# Altium PCB ESIMA_E_Meter_CPU.PcbDoc (part 2 of 2)
Units mm, origin at the board's own origin, x right, y up, seen from the top; angles counter-clockwise.
Board outline 113.5 x 71.72 mm, 4 copper layers (Top Layer, Mid1, Mid2, Bottom Layer), stack 0.778 mm thick; 163 components, 166 nets, 524 pads, 112 vias.
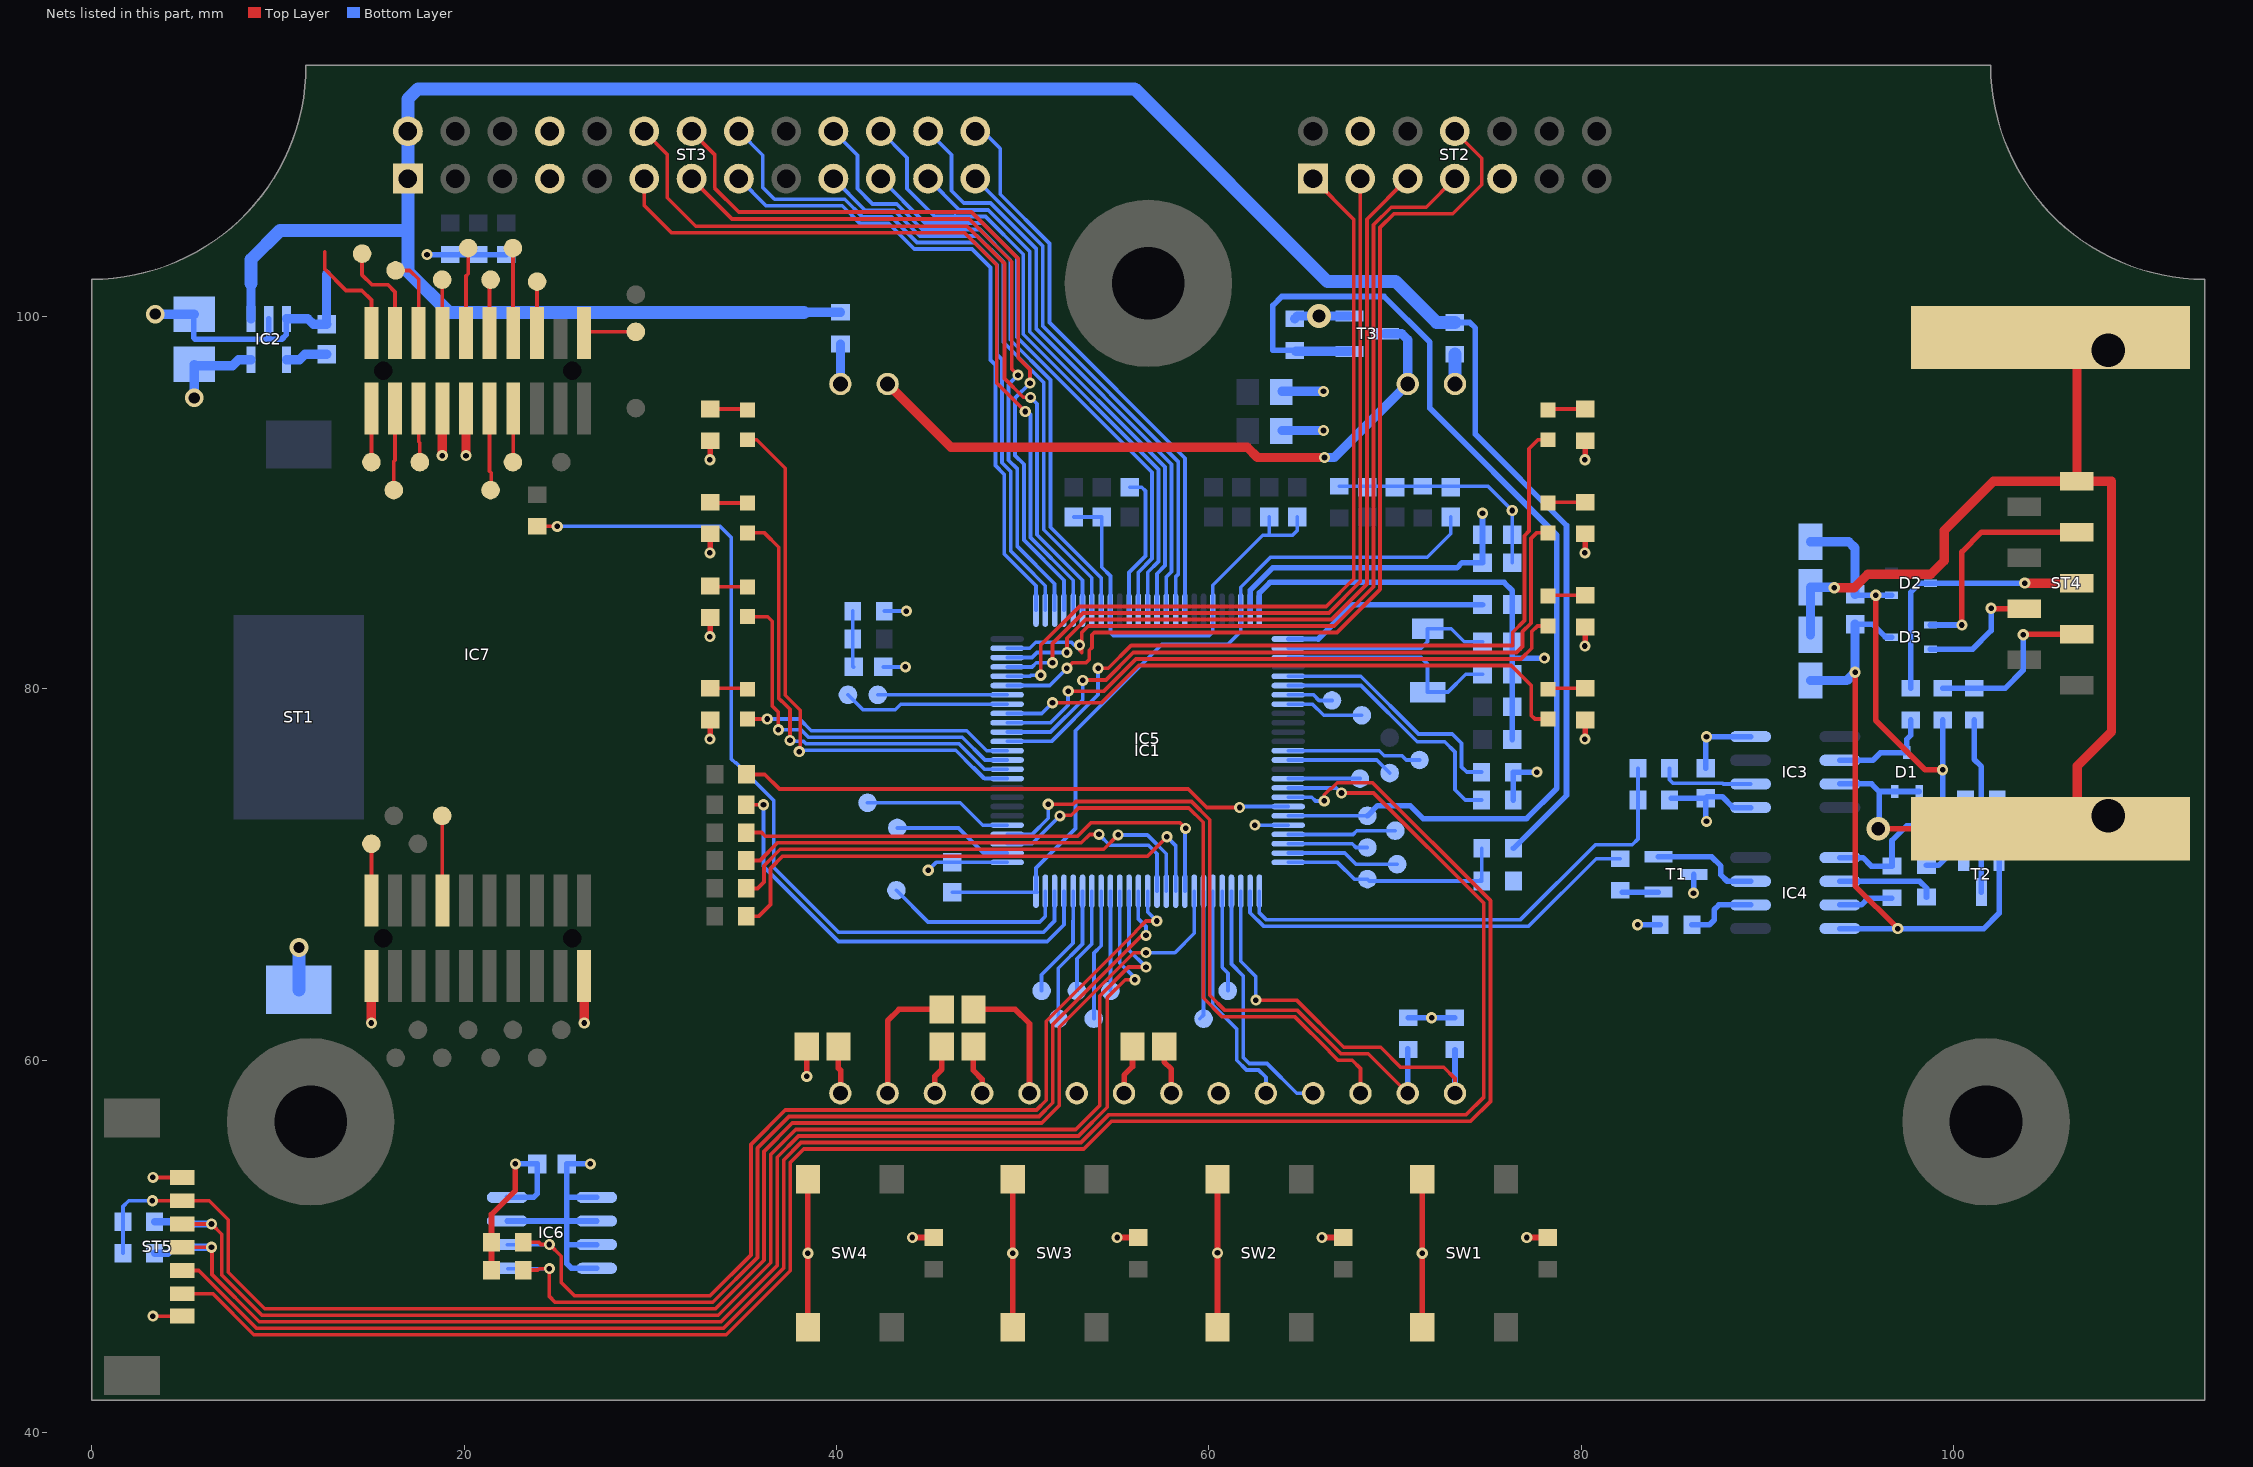
[diagram p4: the nets of this part, all layers, seen from the top]

## Via types
v1: diameter 0.6, hole 0.3, Top Layer to Bottom Layer, tented both sides, 106 vias
v2: diameter 1, hole 0.6, Top Layer to Bottom Layer, tented both sides, 3 vias
v3: diameter 1.27, hole 0.711, Top Layer to Bottom Layer, 2 vias
v4: diameter 0.6, hole 0.3, Top Layer to Bottom Layer, 1 vias

## Nets (pads, with @x,y where several pads share a name; then routed paths per layer and width w, separated by ;. In a path a pad name is that pad's centre, name@x,y a point inside that pad or via, vN(x,y) a via of type N, cw(c..) or ccw(c..) an arc to the next point about the centre after c; other vN are vias at no path point) (continued)
DGND: C2.1 C5.1 C10.1 C11.1 C12.1 C13.1 C14.1 C15.1 C16.1 C17.1 C18.1 C19.1 C20.1 C21.2 C22.1 C26.1 C27.1 C30.1 IC1.25 IC1.46 IC1.76 IC2.2 IC2.3 IC3.5 IC5.20 IC5.21 IC6.1 IC6.2 IC6.3 IC6.4 IC6.7 IC7.x1_1 IC7.x1_19 IC7.x2_2 R4.2 R5.1 R6.1 R12.1 R15.2 R51.2 ST1.2 ST2.9 ST3.7 ST3.8 ST5.7 SW1.1 SW1.3 SW2.1 SW2.3 SW3.1 SW3.3 SW4.1 SW4.3 T1.3 T3.2 | length 139.4
  Top Layer w0.2: v1(3.275,46.275) ST5.7@4.85,46.275 ; 12.515,103.45 12.515,102.51 13.65,101.375 14.5,101.375 15.014,100.861 IC7.x2_2@15.014,99.082
  Top Layer w0.3: v1(38.4,59.15) C30.1@38.4,60.75 ; SW4.1@38.465,45.675 v1(38.465,49.65) SW4.3@38.465,53.625 ; SW3.1@49.465,45.675 v1(49.465,49.65) SW3.3@49.465,53.625 ; IC5.21@55.445,58.25 55.445,59.22 55.9,59.675 C27.1@55.9,60.75 ; SW2.1@60.465,45.675 v1(60.465,49.675) SW2.3@60.465,53.625 ; SW1.1@71.465,45.675 v1(71.465,49.65) SW1.3@71.465,53.625
  Top Layer w0.5: v1(15.014,62.021) IC7.x1_1@15.014,64.542 ; v1(26.444,62.021) IC7.x1_19@26.444,64.542
  Bottom Layer w0.2: C19.1@42.515,81.15 v1(43.7,81.15) ; v1(44.925,70.225) 45.35,70.65 IC1.76@49.165,70.65 ; v1(62.475,72.65) IC1.46@64.265,72.65 ; R6.1@67,90.85 R5.1@71.5,90.85 75,90.85 v1(76.3,89.55) C2.1@76.3,88.25 C5.1@76.3,86.75
  Bottom Layer w0.3: C21.2@5.5,100.1 5.475,100.075 5.475,98.825 5.55,98.75 9.575,98.75 ; IC2.2@9.5,99.85 9.5,98.825 9.575,98.75 ; IC2.3@10.45,99.85 10.45,99 10.2,98.75 9.575,98.75 ; v2@11.115,66.065 v2(11.125,66.075) ; IC6.7@22.315,51.385 25.515,51.385 ; 25.525,50.115 IC6.3@27.115,50.115 ; 25.57,52.655 IC6.1@27.115,52.655 ; v1(26.775,54.45) C26.1@25.515,54.45 25.515,51.385 ; IC6.4@27.115,48.845 25.76,48.845 25.515,49.09 25.515,51.385 ; IC6.2@27.115,51.385 25.515,51.385 ; IC1.25@62.715,84.2 62.715,85.124 63.283,85.692 75.858,85.692 76.3,85.25 C14.1@76.3,84.5 C18.1@76.3,82.5 76.3,81.625 ; C13.1@76.3,77.25 C12.1@76.3,79 C17.1@76.3,80.75 76.3,81.625 ; v1(78.025,81.625) 76.3,81.625 ; R15.2@84.85,74.1 C22.1@86.7,74.1 ; v1(86.035,69) 86.05,69.015 T1.3@86.05,70 ; v1(86.735,72.85) 86.7,72.885 C22.1@86.7,74.1 ; IC3.5@89.1,73.595 88.165,73.595 87.585,74.175 86.775,74.175 C22.1@86.7,74.1
  Bottom Layer w0.5: v2(3.4,100.1) 3.4,100.05 3.45,100.1 C21.2@5.5,100.1 ; IC2.3@10.45,99.85 11.6,99.85 11.9,99.55 C20.1@12.5,99.55 ; 12.6,102.25 12.6,99.65 C20.1@12.5,99.55 ; C20.1@12.615,99.55 C20.1@12.5,99.55 ; R4.2@63.925,95.95 v1(66.16,95.95) ; R51.2@64.615,99.85 64.765,100 T3.2@67.565,100
  Bottom Layer w0.7: ST1.2@11.115,63.8 v2@11.115,66.065
  other v3: 65.915,100
DVCC: C2.2 C5.2 C21.1 C22.2 C26.2 C27.2 IC1.24 IC2.5 IC3.8 IC5.22 IC5.23 IC6.8 IC7.x2_7 IC7.x2_9 R1.2 R2.2 R3.2 R9.1 R10.1 R13.1 R17.1 R24.2 R25.2 R26.2 R27.2 R28.2 R29.1 R30.2 R32.1 R34.1 R35.1 R36.1 R37.1 R38.1 R39.1 R40.1 R41.1 ST2.4 ST5.1 | length 71.7
  Top Layer w0.2: v1(3.275,53.725) ST5.1@4.85,53.725
  Top Layer w0.3: R28.2@21.465,48.75 R30.2@21.465,50.25 21.465,51.74 22.75,53.025 v1(22.75,54.45) ; v1(33.2,77.275) 33.215,77.29 R37.1@33.215,78.3 ; v1(33.2,82.775) 33.215,82.79 R36.1@33.215,83.8 ; v1(33.2,87.275) 33.215,87.29 R35.1@33.215,88.3 ; v1(33.2,92.275) 33.215,92.29 R34.1@33.215,93.3 ; v1(44.075,50.5) R27.2@45.215,50.5 ; v1(55.075,50.5) R26.2@56.215,50.5 ; C27.2@57.6,60.75 57.6,59.925 57.985,59.54 IC5.22@57.985,58.25 ; v1(66.075,50.5) R25.2@67.215,50.5 ; v1(77.075,50.5) R24.2@78.215,50.5 ; v1(80.2,77.275) 80.215,77.29 R41.1@80.215,78.3 ; v1(80.2,82.275) 80.215,82.29 R40.1@80.215,83.3 ; v1(80.2,87.275) 80.215,87.29 R39.1@80.215,88.3 ; v1(80.2,92.275) 80.215,92.29 R38.1@80.215,93.3 ; v1(86.735,77.4) v1@86.74,77.405
  Top Layer w0.5: v1(18.824,92.501) IC7.x2_7@18.824,95.022 ; v1(20.094,92.501) IC7.x2_9@20.094,95.022
  Bottom Layer w0.3: v1(18,103.3) R13.1@19.25,103.3 R10.1@20.75,103.3 R9.1@22.25,103.3 ; IC6.8@22.315,52.655 23.73,52.655 23.915,52.84 C26.2@23.915,54.45 v1(22.75,54.45) ; IC1.24@62.215,84.2 62.215,85.26 63.425,86.47 73.32,86.47 73.6,86.75 C5.2@74.7,86.75 v1(74.7,89.4) ; R32.1@70.715,62.3 v1(71.965,62.3) R29.1@73.215,62.3 ; R1.2@76.35,74 R2.2@76.35,75.5 v1(77.625,75.5) ; v1(83.035,67.3) R17.1@84.25,67.3 ; C22.2@86.7,75.7 86.7,77.365 v1(86.735,77.4) IC3.8@89.095,77.4 ; IC3.8@89.095,77.405 IC3.8@89.1,77.405
  Bottom Layer w0.5: v2(5.5,95.6) C21.1@5.5,97.4 5.575,97.325 7.55,97.325 7.875,97.65 IC2.5@8.55,97.65 ; R3.2@63.925,93.85 v1(66.16,93.85)
EEPI2C.NFC_INT0: IC1.42 ST5.5 | length 103.2
  Top Layer w0.2: ST5.5@4.85,48.725 5.745,48.725 8.845,45.625 33.935,45.625 37.165,48.855 37.165,54.669 38.096,55.6 53.14,55.6 54.64,57.1 73.825,57.1 74.775,58.05 74.775,68.45 68.85,74.375 v1(67.125,74.375)
  Bottom Layer w0.2: IC1.42@64.265,74.65 66.85,74.65 v1(67.125,74.375)
EEPI2C.NFC_INT1: IC1.43 ST5.6 | length 104.7
  Top Layer w0.2: ST5.6@4.85,47.475 6.5,47.475 8.7,45.275 34.08,45.275 37.515,48.71 37.515,54.524 38.241,55.25 53.285,55.25 54.785,56.75 74.065,56.75 75.125,57.81 75.125,68.595 68.795,74.925 66.897,74.925 66.575,74.603 66.522,74.603 66.2,74.281 v1(66.2,73.95)
  Bottom Layer w0.2: IC1.43@64.265,74.15 65.525,74.15 65.725,73.95 v1(66.2,73.95)
EEPI2C.NFC_SCL: IC1.65 R31.1 ST5.3 | length 77.3
  Top Layer w0.2: ST5.3@4.85,51.225 v1(6.425,51.225) 6.975,50.675 6.975,48.485 9.135,46.325 33.645,46.325 36.465,49.145 36.465,54.959 37.806,56.3 52.85,56.3 54.14,57.59 54.14,63.475 55.69,65.025 v1(56.625,65.025)
  Bottom Layer w0.2: IC1.65@55.715,69.1 55.715,65.932 56.622,65.025 v1(56.625,65.025)
  Bottom Layer w0.4: R31.1@3.365,51.35 4.725,51.35 4.85,51.225 v1(6.425,51.225)
EEPI2C.NFC_SDA: IC1.66 R33.1 ST5.4 | length 76.4
  Top Layer w0.2: ST5.4@4.85,49.975 v1(6.425,49.975) 6.45,49.95 6.45,48.515 8.99,45.975 33.79,45.975 36.815,49 36.815,54.814 37.951,55.95 52.995,55.95 54.545,57.5 54.545,63.385 55.505,64.345 v1(56.03,64.345)
  Bottom Layer w0.2: IC1.66@55.215,69.1 55.215,65.25 56.03,64.435 v1(56.03,64.345)
  Bottom Layer w0.4: R33.1@3.365,49.65 4.075,49.65 4.4,49.975 v1(6.425,49.975)
EEPI2C.NFC_VCC: IC1.58 R31.2 R33.2 ST5.2 | length 80.8
  Top Layer w0.2: v1(3.25,52.475) ST5.2@4.85,52.475 6.3,52.475 7.325,51.45 7.325,48.63 9.28,46.675 33.5,46.675 36.1,49.275 36.1,55.125 37.625,56.65 51.028,56.65 51.965,57.587 51.965,61.795 55.97,65.8 v1(56.625,65.8)
  Bottom Layer w0.2: R33.2@1.665,49.65 1.665,50.5 ; 1.67,50.495 1.665,50.5 ; v1(3.25,52.475) 1.975,52.475 1.665,52.165 R31.2@1.665,51.35 1.665,50.5 ; v1(56.625,65.8) 58.175,65.8 59.215,66.84 IC1.58@59.215,69.1
EEPI2C.SCL: IC1.63 IC6.6 R30.1 | length 54.6
  Top Layer w0.2: R30.1@23.165,50.25 24,50.25 24.125,50.125 v1(24.575,50.125) 25.213,49.488 25.213,48.088 25.925,47.375 33.21,47.375 35.4,49.565 35.4,55.5 37.25,57.35 50.738,57.35 51.265,57.877 51.265,62.115 56.075,66.925 56.075,66.953 56.622,67.5 v1(57.201,67.5)
  Bottom Layer w0.2: IC6.6@22.315,50.115 24.565,50.115 v1(24.575,50.125) ; IC1.63@56.715,69.1 56.715,67.986 v1(57.201,67.5) v1@57.35,67.649
EEPI2C.SDA: IC1.64 IC6.5 R28.1 | length 53.9
  Top Layer w0.2: R28.1@23.165,48.75 23.95,48.75 24.025,48.825 24.475,48.825 v1@24.525,48.775 ; v1(24.575,48.825) 24.575,47.325 24.875,47.025 33.355,47.025 35.75,49.42 35.75,55.3 37.45,57 50.883,57 51.615,57.732 51.615,61.94 56.4,66.725 v1(56.625,66.725)
  Bottom Layer w0.2: IC6.5@22.335,48.825 v1(24.575,48.825) ; IC1.64@56.215,69.1 56.215,67.61 56.625,67.2 v1(56.625,66.725)
I+1: IC1.7 ST3.19 | length 31.7
  Bottom Layer w0.2: ST3.19@39.835,107.38 41.545,105.67 43.096,105.67 44.465,104.3 47.565,104.3 48.971,102.894 48.971,98.593 51.137,96.427 51.137,88.513 53.715,85.935 IC1.7@53.715,84.2
I+2: IC1.12 ST3.21 | length 31.3
  Bottom Layer w0.2: ST3.21@42.375,107.38 44.755,105 47.855,105 49.685,103.17 49.685,98.869 56.949,91.605 56.949,86.967 56.215,86.233 IC1.12@56.215,84.2
I+3: IC1.14 ST3.23 | length 29.7
  Bottom Layer w0.2: ST3.23@44.915,107.256 ST3.23@44.915,107.38 46.595,105.7 48.145,105.7 50.385,103.46 50.385,99.159 57.649,91.895 57.649,86.591 57.215,86.157 IC1.14@57.215,84.2
I+4: IC1.16 ST3.25 | length 27.7
  Bottom Layer w0.2: ST3.25@47.455,107.38 51.085,103.75 51.085,99.449 58.349,92.185 58.349,86.113 58.215,85.979 IC1.16@58.215,84.2
I-1: IC1.8 ST3.20 | length 34.3
  Bottom Layer w0.2: ST3.20@39.835,109.92 41.123,108.632 41.123,106.832 41.935,106.02 43.24,106.02 44.61,104.65 47.71,104.65 49.335,103.025 49.335,98.724 51.497,96.562 51.497,88.648 54.215,85.93 IC1.8@54.215,84.2
I-2: IC1.13 ST3.22 | length 33.7
  Bottom Layer w0.2: ST3.22@42.375,109.92 43.79,108.505 43.79,106.832 45.272,105.35 46.304,105.35 ; 46.347,105.393 46.389,105.35 48,105.35 50.035,103.315 50.035,99.014 57.299,91.75 57.299,86.817 56.715,86.233 IC1.13@56.715,84.2
I-3: IC1.15 ST3.24 | length 32.1
  Bottom Layer w0.2: ST3.24@44.915,109.92 46.177,108.658 46.177,106.731 46.838,106.07 48.27,106.07 50.735,103.605 50.735,99.304 57.999,92.04 57.999,86.258 57.715,85.974 IC1.15@57.715,84.2
I-4: IC1.17 ST3.26 | length 30.6
  Bottom Layer w0.2: ST3.26@47.455,109.92 47.865,109.92 48.793,108.991 48.793,106.537 51.435,103.895 51.435,99.644 58.715,92.364 IC1.17@58.715,84.2
IGND: C24.1 C25.2 D1.1 D1.2 IC3.3 ST4.5 ST4.10 ST4.11 | length 62.1
  Top Layer w0.3: v3(95.965,72.45) ST4.11@105.215,72.45
  Top Layer w0.5: v1(93.6,85.4) 94.665,85.4 95.395,86.13 98.78,86.13 99.5,86.85 99.5,88.48 102.15,91.13 ST4.5@106.635,91.13 ; ST4.10@106.635,97.43 ST4.5@106.635,91.13 ; ST4.11@106.65,73.885 106.65,75.825 108.485,77.66 108.485,91.13 ST4.5@106.635,91.13
  Bottom Layer w0.3: IC3.3@93.9,74.865 95.6,74.865 96.007,74.458 ; v3(95.965,72.45) 96.007,72.491 96.007,74.458 ; D1.1@98.15,74.458 D1.2@96.85,74.458 96.007,74.458
  Bottom Layer w0.5: C25.2@92.315,82.875 C24.1@92.315,85.425 93.575,85.425 v1(93.6,85.4)
LCD.CD: IC1.78 IC5.26 | length 32.6
  Top Layer w0.2: v1(52,73.15) 52.027,73.177 52.607,73.177 53.005,73.575 58.923,73.575 59.697,72.8 59.697,63.373 60.72,62.35 64.624,62.35 66.475,60.499 66.475,60.48 66.938,60.018 67.708,60.018 68.145,59.58 IC5.26@68.145,58.25
  Bottom Layer w0.2: IC1.78@49.165,71.65 50.5,71.65 v1(52,73.15) v1@52,73.005
LCD.CLK: IC1.54 IC5.25 | length 13.7
  Bottom Layer w0.2: IC1.54@61.215,69.1 61.215,65.185 61.85,64.55 61.85,60.17 62.17,59.85 63.125,59.85 64.725,58.25 IC5.25@65.605,58.25
LCD.CS0: IC1.53 IC5.28 R29.2 | length 21.8
  Top Layer w0.2: v1(62.525,63.25) 64.714,63.25 67.247,60.718 69.233,60.718 70.3,59.65 72.615,59.65 73.225,59.04 IC5.28@73.225,58.25
  Bottom Layer w0.2: IC1.53@61.715,69.1 61.715,65.335 62.525,64.525 v1(62.525,63.25)
  Bottom Layer w0.3: IC5.28@73.225,58.25 R29.2@73.225,60.59
LCD.LIGHT: IC1.45 R51.1 T3.1 TP3.1 | length 58.6
  Bottom Layer w0.2: IC1.45@64.265,73.15 TP3.1@68.515,73.15
  Bottom Layer w0.3: R51.1@64.615,98.15 63.44,98.15 63.44,100.575 63.915,101.05 69.415,101.05 71.865,98.6 71.865,95.05 78.69,88.225 78.69,74.625 77.065,73 71.515,73 70.815,73.7 69.065,73.7 TP3.1@68.515,73.15
  Bottom Layer w0.5: R51.1@64.665,98.1 T3.1@67.565,98.1
LCD.MOSI: IC1.56 IC5.24 | length 12.4
  Bottom Layer w0.2: IC1.56@60.215,69.1 60.215,62.99 61.5,61.705 61.5,60.025 62.025,59.5 62.675,59.5 63.065,59.11 IC5.24@63.065,58.25
LCD.RST: IC1.79 IC5.27 R32.2 | length 37.1
  Top Layer w0.2: v1(51.375,73.775) 52.71,73.775 52.86,73.925 59.068,73.925 60.047,72.945 60.047,63.518 60.865,62.7 64.769,62.7 67.102,60.368 68.568,60.368 IC5.27@70.685,58.25
  Bottom Layer w0.2: IC1.79@49.165,72.15 50.505,72.15 51.375,73.02 v1(51.375,73.775)
  Bottom Layer w0.3: IC5.27@70.685,58.25 R32.2@70.685,60.63
LED1: IC1.85 LED1.1 | length 30.8
  Top Layer w0.2: LED1.1@35.215,93.35 35.72,93.35 37.25,91.82 37.25,79.625 38.05,78.825 38.05,76.65 v1(38,76.6)
  Bottom Layer w0.2: v1(38,76.6) 38.075,76.675 46.4,76.675 47.35,75.725 ; 47.89,75.185 47.35,75.725 ; IC1.85@49.165,75.15 47.955,75.15 47.38,75.725 47.35,75.725
LED2: IC1.86 LED2.1 | length 24.9
  Top Layer w0.2: LED2.1@35.215,88.35 36.125,88.35 36.9,87.575 36.9,79.456 37.038,79.318 ; 37.05,79.33 37.5,78.88 v1(37.5,77.2)
  Bottom Layer w0.2: v1(37.5,77.2) 37.55,77.15 38.228,77.15 38.353,77.025 46.575,77.025 47.95,75.65 IC1.86@49.165,75.65
LED3: IC1.87 LED3.1 | length 20.4
  Top Layer w0.2: LED3.1@35.215,83.85 36.3,83.85 36.55,83.6 36.55,79.05 36.875,78.725 v1(36.875,77.775)
  Bottom Layer w0.2: v1(36.875,77.775) 38.098,77.775 38.498,77.375 46.75,77.375 47.975,76.15 IC1.87@49.165,76.15
LED4: IC1.88 LED4.1 | length 14.7
  Top Layer w0.2: LED4.1@35.215,78.35 v1(36.275,78.35)
  Bottom Layer w0.2: v1(36.275,78.35) 38.018,78.35 38.643,77.725 47,77.725 48.075,76.65 IC1.88@49.165,76.65
LED5: IC1.89 LED6.1 | length 42.3
  Top Layer w0.2: v1(54.05,81.075) 54.6,81.075 55.825,82.3 76.325,82.3 76.325,83.015 76.955,83.645 76.955,88.2 77.2,88.445 77.2,92.875 77.675,93.35 LED6.1@78.215,93.35
  Bottom Layer w0.2: IC1.89@49.165,77.15 51.55,77.15 54.05,79.65 v1(54.05,81.075)
LED6: IC1.90 LED5.1 | length 37.2
  Top Layer w0.2: v1(53.225,80.425) 53.25,80.45 54.47,80.45 55.945,81.925 76.525,81.925 76.85,82.25 76.85,83.045 77.305,83.5 77.305,88.055 77.6,88.35 LED5.1@78.215,88.35
  Bottom Layer w0.2: IC1.90@49.165,77.65 51.495,77.65 53.225,79.38 v1(53.225,80.425)
LED7: IC1.91 LED7.1 | length 32.2
  Top Layer w0.2: v1(52.45,79.85) 54.365,79.85 56.09,81.575 76.775,81.575 77.35,82.15 77.35,83.05 77.65,83.35 LED7.1@78.215,83.35
  Bottom Layer w0.2: IC1.91@49.165,78.15 51.5,78.15 52.438,79.088 52.438,79.638 52.45,79.65 v1(52.45,79.85)
LED8: IC1.92 LED8.1 | length 32.3
  Top Layer w0.2: v1(51.6,79.225) 54.235,79.225 56.235,81.225 76.25,81.225 77.325,80.15 77.325,78.54 77.515,78.35 LED8.1@78.215,78.35
  Bottom Layer w0.2: IC1.92@49.165,78.65 51.025,78.65 v1(51.6,79.225)
MCLK: IC1.33 TP20.1 | length 4.2
  Bottom Layer w0.2: IC1.33@64.265,79.15 65.575,79.15 66.175,78.55 TP20.1@68.215,78.55
NetC1_2: C1.2 IC1.11 | length 7.7
  Bottom Layer w0.2: IC1.11@55.715,84.2 55.715,86.228 56.599,87.112 56.599,90.6 56.399,90.8 C1.2@55.75,90.8
NetC4_2: C4.2 C7.2 C8.2 C9.2 IC1.9 IC1.20 | length 23.5
  Bottom Layer w0.2: C8.2@52.75,89.2 C9.2@54.25,89.2 54.25,86.5 54.715,86.035 IC1.9@54.715,84.2 54.715,82.985 54.875,82.825 60.015,82.825 60.215,83.025 IC1.20@60.215,84.2 60.215,85.54 62.9,88.225 63.25,88.225 ; C7.2@63.25,89.2 63.25,88.225 ; C4.2@64.75,89.2 64.75,88.475 64.5,88.225 63.25,88.225
NetC10_2: C10.2 C11.2 IC1.23 IC1.75 | length 40.9
  Bottom Layer w0.2: C10.2@46.215,69.05 IC1.75@50.765,69.05 ; IC1.75@50.715,69.1 50.715,70.35 52.84,72.475 52.84,77.725 57.465,82.35 61.015,82.35 61.715,83.05 IC1.23@61.715,84.2 61.715,85.435 63.315,87.035 71.735,87.035 73,88.3 C11.2@73,89.2
NetC14_2: C14.2 IC1.26 | length 11.2
  Bottom Layer w0.25: IC1.26@64.265,82.65 65.875,82.65
  Bottom Layer w0.3: 65.875,82.65 67.725,84.5 C14.2@74.7,84.5
NetC17_2: C17.2 IC1.28 Q1.1 | length 12.5
  Bottom Layer w0.2: IC1.28@64.265,81.65 71.4,81.65 71.75,81.3 Q1.1@71.75,79.8 72.85,79.8 73.8,80.75 C17.2@74.7,80.75
NetC18_2: C18.2 IC1.27 Q1.2 | length 11.6
  Bottom Layer w0.2: IC1.27@64.265,82.15 71.4,82.15 71.75,82.5 Q1.2@71.75,83.2 73.025,83.2 73.725,82.5 C18.2@74.7,82.5
NetC19_2: C19.2 R7.2 R8.2 | length 3
  Bottom Layer w0.2: R8.2@40.865,84.15 R7.2@40.865,82.65 40.865,81.2 C19.2@40.915,81.15
NetC20_2: C20.2 IC2.4 | length 2.3
  Bottom Layer w0.5: IC2.4@10.45,97.65 11.15,97.65 11.45,97.95 C20.2@12.615,97.95
NetC23_1: C23.1 C24.2 D2.1 IC4.5 R18.1 R22.1 | length 30.8
  Top Layer w0.3: v1(95.825,85) 95.825,78.275 98.475,75.625 v1(99.415,75.625)
  Bottom Layer w0.3: IC4.5@93.9,70.905 95.13,70.905 95.585,70.45 R18.1@96.7,70.45 96.7,71.825 97.488,72.613 98.338,72.613 99.415,73.69 v1(99.415,75.625) R22.1@99.415,78.3 ; C23.1@94.765,85 v1(95.825,85) D2.1@96.674,85
  Bottom Layer w0.5: C24.2@92.315,87.875 94.375,87.875 94.715,87.535 C23.1@94.715,85.05
NetC23_2: C23.2 C25.1 D3.3 IC4.8 R21.1 T2.2 | length 37
  Top Layer w0.3: v1(94.715,80.865) 94.715,69.39 v1(97.01,67.095)
  Bottom Layer w0.3: IC4.8@93.9,67.095 v1(97.01,67.095) 101.63,67.095 102.45,67.915 T2.2@102.45,70.95 R21.1@102.45,73.9 ; C23.2@94.715,83.45 95.65,83.45 96.35,82.75 D3.3@96.674,82.75
  Bottom Layer w0.5: C25.1@92.315,80.425 94.275,80.425 v1(94.715,80.865) C23.2@94.715,83.45
NetC28_1: C28.1 IC5.18 | length 2.7
  Top Layer w0.3: C28.1@47.35,60.75 47.35,59.475 47.825,59 IC5.18@47.825,58.25
NetC28_2: C28.2 IC5.17 | length 2.7
  Top Layer w0.3: IC5.17@45.285,58.25 45.285,59.16 45.65,59.525 C28.2@45.65,60.75
NetC29_1: C29.1 IC5.19 | length 7.1
  Top Layer w0.3: C29.1@47.35,62.75 49.6,62.75 50.365,61.985 IC5.19@50.365,58.25
NetC29_2: C29.2 IC5.16 | length 7.1
  Top Layer w0.3: IC5.16@42.745,58.25 42.745,62.145 43.35,62.75 C29.2@45.65,62.75
NetC30_2: C30.2 IC5.15 | length 2.6
  Top Layer w0.3: C30.2@40.1,60.75 40.1,59.6 40.225,59.475 40.225,58.27 IC5.15@40.205,58.25
NetD1_3: D1.3 IC3.2 R20.2 | length 5.6
  Bottom Layer w0.3: IC3.2@93.9,76.135 95.67,76.135 96.077,76.542 D1.3@97.5,76.542 97.5,77.275 97.715,77.49 R20.2@97.715,78.3
NetD2_3: D2.3 R20.1 ST4.3 | length 14.3
  Top Layer w0.5: v1(103.825,85.65) ST4.3@106.635,85.65
  Bottom Layer w0.3: R20.1@97.715,80 97.715,85.165 98.2,85.65 D2.3@98.757,85.65 v1(103.825,85.65)
NetD3_1: D3.1 ST4.4 | length 12.2
  Top Layer w0.3: v1(100.45,83.4) 100.45,87.325 101.515,88.39 ST4.4@106.635,88.39
  Bottom Layer w0.3: D3.1@98.757,83.4 v1(100.45,83.4)
NetD3_2: D3.2 ST4.7 | length 6.7
  Top Layer w0.3: v1(102.025,84.3) 102.045,84.28 ST4.7@103.795,84.28
  Bottom Layer w0.3: D3.2@98.757,82.1 101.025,82.1 102.025,83.1 v1(102.025,84.3)
NetIC1_30: IC1.30 R2.1 | length 13.3
  Bottom Layer w0.2: IC1.30@64.265,80.65 68.165,80.65 71.265,77.55 73.075,77.55 73.575,77.05 73.575,75.775 73.85,75.5 R2.1@74.65,75.5
NetIC1_31: IC1.31 R1.1 | length 14.1
  Bottom Layer w0.2: IC1.31@64.265,80.15 68.17,80.15 71.192,77.128 72.673,77.128 73.225,76.575 73.225,74.55 73.775,74 R1.1@74.65,74
NetIC1_38: IC1.38 TP1.1 | length 7.3
  Bottom Layer w0.2: IC1.38@64.265,76.65 69.15,76.65 69.425,76.375 70.375,76.375 70.6,76.15 TP1.1@71.315,76.15
NetIC1_39: IC1.39 TP2.1 | length 5.7
  Bottom Layer w0.2: IC1.39@64.265,76.15 69.015,76.15 TP2.1@69.715,75.45
NetIC1_41: IC1.41 TP22.1 | length 3.8
  Bottom Layer w0.2: IC1.41@64.265,75.15 TP22.1@68.115,75.15
NetIC1_47: IC1.47 TP4.1 | length 5.8
  Bottom Layer w0.2: IC1.47@64.265,72.15 67.75,72.15 67.95,72.35 TP4.1@70.015,72.35
NetIC1_48: IC1.48 TP5.1 | length 4.3
  Bottom Layer w0.2: IC1.48@64.265,71.65 67.7,71.65 67.9,71.45 TP5.1@68.515,71.45
NetIC1_49: IC1.49 TP6.1 | length 6.1
  Bottom Layer w0.2: IC1.49@64.265,71.15 67.3,71.15 67.9,70.55 TP6.1@70.115,70.55
NetIC1_55: IC1.55 TP8.1 | length 5.5
  Bottom Layer w0.2: IC1.55@60.715,69.1 60.715,65.01 61.025,64.7 61.025,63.76 TP8.1@61.015,63.75
NetIC1_57: IC1.57 TP9.1 | length 6.9
  Bottom Layer w0.2: TP9.1@59.515,62.25 59.715,62.45 IC1.57@59.715,69.1
NetIC1_67: IC1.67 TP10.1 | length 5.3
  Bottom Layer w0.2: TP10.1@54.715,63.75 IC1.67@54.715,69.1
NetIC1_68: IC1.68 TP11.1 | length 7
  Bottom Layer w0.2: TP11.1@53.825,62.26 53.825,65.785 54.215,66.175 IC1.68@54.215,69.1
NetIC1_69: IC1.69 TP12.1 | length 5.7
  Bottom Layer w0.2: TP12.1@52.915,63.75 52.915,65.47 53.715,66.27 IC1.69@53.715,69.1
NetIC1_70: IC1.70 TP13.1 | length 7.4
  Bottom Layer w0.2: TP13.1@51.915,62.25 51.915,64.965 53.215,66.265 IC1.70@53.215,69.1
NetIC1_71: IC1.71 TP14.1 | length 6.1
  Bottom Layer w0.2: TP14.1@51.015,63.75 51.015,64.615 52.7,66.3 52.7,67.505 52.715,67.52 IC1.71@52.715,69.1
NetIC1_74: IC1.74 TP51.1 | length 10.2
  Bottom Layer w0.2: TP51.1@43.215,69.15 44.915,67.45 50.915,67.45 51.215,67.75 IC1.74@51.215,69.1
NetIC1_77: IC1.77 TP15.1 | length 6.5
  Bottom Layer w0.2: TP15.1@43.265,72.5 46.55,72.5 47.9,71.15 IC1.77@49.165,71.15
NetIC1_80: IC1.80 TP16.1 | length 8
  Bottom Layer w0.2: TP16.1@41.665,73.85 46.65,73.85 47.85,72.65 IC1.80@49.165,72.65
NetIC1_93: IC1.93 TP17.1 | length 9
  Bottom Layer w0.2: TP17.1@40.615,79.65 41.415,78.85 43.15,78.85 43.45,79.15 IC1.93@49.165,79.15
NetIC1_94: IC1.94 TP18.1 | length 6.9
  Bottom Layer w0.2: TP18.1@42.215,79.65 IC1.94@49.165,79.65
NetIC3_6: IC3.6 R16.1 | length 5.1
  Bottom Layer w0.2: R16.1@84.75,75.7 84.75,75.085 84.935,74.9 87.61,74.9 87.645,74.865 IC3.6@89.1,74.865
NetIC4_2: IC4.2 R17.2 | length 3.9
  Bottom Layer w0.3: R17.2@85.95,67.3 86.885,67.3 87.147,67.563 87.147,68.113 87.4,68.365 IC4.2@89.1,68.365
NetIC4_3: IC4.3 T1.2 | length 5.8
  Bottom Layer w0.3: T1.2@84.15,70.95 87.01,70.95 87.51,70.45 87.51,69.975 87.85,69.635 IC4.3@89.1,69.635
NetIC4_6: IC4.6 R19.2 | length 5.3
  Bottom Layer w0.3: IC4.6@93.9,69.635 98.185,69.635 98.55,69.27 R19.2@98.55,68.785
NetIC4_7: IC4.7 R18.2 | length 2.9
  Bottom Layer w0.3: IC4.7@93.9,68.365 95.05,68.365 95.41,68.725 R18.2@96.675,68.725
NetIC5_1: IC5.1 R50.2 | length 1.6
  Bottom Layer w0.7: R50.2@73.215,97.95 73.225,97.94 IC5.1@73.225,96.35
NetIC5_2: IC5.2 IC5.13 T3.3 | length 34.9
  Top Layer w0.5: IC5.13@42.745,96.35 46.145,92.95 62.065,92.95 62.615,92.4 v4(66.215,92.4)
  Bottom Layer w0.5: v4(66.215,92.4) 66.735,92.4 IC5.2@70.685,96.35 70.685,98.73 70.365,99.05 T3.3@69.465,99.05
NetIC5_14: IC5.14 R49.2 | length 2.2
  Bottom Layer w0.2: IC5.14@40.205,96.35 IC5.14@40.215,96.36
  Bottom Layer w0.5: IC5.14@40.215,96.36 R49.2@40.215,98.5
NetIC7_x1_2: IC7.x1_2 TP31.1 | length 3
  Top Layer w0.2: IC7.x1_2@15.014,68.602 TP31.1@15.015,71.65
NetIC7_x1_8: IC7.x1_8 TP32.1 | length 4.6
  Top Layer w0.2: TP32.1@18.815,73.15 18.824,73.141 IC7.x1_8@18.824,68.602
NetIC7_x2_1: IC7.x2_1 TP37.1 | length 2.9
  Top Layer w0.2: TP37.1@15.014,92.151 IC7.x2_1@15.014,95.022
NetIC7_x2_3: IC7.x2_3 TP38.1 | length 4.4
  Top Layer w0.2: TP38.1@16.215,90.65 16.215,92.181 16.284,92.25 IC7.x2_3@16.284,95.022
NetIC7_x2_4: IC7.x2_4 TP43.1 | length 5.5
  Top Layer w0.2: TP43.1@14.515,103.35 14.515,102.21 15.05,101.675 15.9,101.675 16.284,101.291 IC7.x2_4@16.284,99.082
NetIC7_x2_5: IC7.x2_5 TP39.1 | length 2.9
  Top Layer w0.2: IC7.x2_5@17.554,95.022 17.554,93.246 17.615,93.185 TP39.1@17.615,92.15
NetIC7_x2_6: IC7.x2_6 TP44.1 | length 4.3
  Top Layer w0.2: TP44.1@16.315,102.45 17.075,102.45 17.554,101.971 IC7.x2_6@17.554,99.082
NetIC7_x2_8: IC7.x2_8 TP45.1 | length 2.9
  Top Layer w0.2: IC7.x2_8@18.815,99.091 TP45.1@18.815,101.95
NetIC7_x2_10: IC7.x2_10 TP46.1 | length 4.6
  Top Layer w0.2: IC7.x2_10@20.094,99.082 20.094,102.144 20.215,102.265 TP46.1@20.215,103.65
NetIC7_x2_11: IC7.x2_11 TP40.1 | length 4.4
  Top Layer w0.2: IC7.x2_11@21.364,95.022 21.364,91.661 21.45,91.575 21.45,90.685 TP40.1@21.415,90.65
NetIC7_x2_12: IC7.x2_12 TP47.1 | length 2.8
  Top Layer w0.2: IC7.x2_12@21.364,99.082 TP47.1@21.364,101.899
NetIC7_x2_13: IC7.x2_13 TP41.1 | length 2.9
  Top Layer w0.2: TP41.1@22.634,92.169 IC7.x2_13@22.634,95.022
NetIC7_x2_14: IC7.x2_14 TP48.1 | length 4.5
  Top Layer w0.2: IC7.x2_14@22.615,99.101 TP48.1@22.615,103.65
NetIC7_x2_16: IC7.x2_16 TP49.1 | length 2.8
  Top Layer w0.2: IC7.x2_16@23.915,99.093 TP49.1@23.915,101.85
NetIC7_x2_20: IC7.x2_20 TP42.1 | length 2.7
  Top Layer w0.2: IC7.x2_20@26.512,99.15 TP42.1@29.215,99.15
NetLED1_2: LED1.2 R34.2 | length 2
  Top Layer w0.2: R34.2@33.215,95 35.165,95 LED1.2@35.215,94.95
NetLED2_2: LED2.2 R35.2 | length 2
  Top Layer w0.2: R35.2@33.215,90 33.265,89.95 LED2.2@35.215,89.95
NetLED3_2: LED3.2 R36.2 | length 2
  Top Layer w0.2: R36.2@33.215,85.5 33.265,85.45 LED3.2@35.215,85.45
NetLED4_2: LED4.2 R37.2 | length 2
  Top Layer w0.2: R37.2@33.215,80 35.165,80 LED4.2@35.215,79.95
NetLED5_2: LED5.2 R39.2 | length 2
  Top Layer w0.2: LED5.2@78.215,89.95 78.265,90 R39.2@80.215,90
NetLED6_2: LED6.2 R38.2 | length 2
  Top Layer w0.2: LED6.2@78.215,94.95 78.265,95 R38.2@80.215,95
NetLED7_2: LED7.2 R40.2 | length 2
  Top Layer w0.2: LED7.2@78.215,84.95 78.265,85 R40.2@80.215,85
NetLED8_2: LED8.2 R41.2 | length 2
  Top Layer w0.2: LED8.2@78.215,79.95 78.265,80 R41.2@80.215,80
NetR14_1: R14.1 T1.1 | length 1.9
  Bottom Layer w0.3: R14.1@82.2,69.05 T1.1@84.15,69.05
NetR19_1: R19.1 R21.2 T2.1 | length 5.1
  Bottom Layer w0.3: R19.1@98.55,70.485 99.195,70.485 99.66,70.95 T2.1@100.55,70.95 R21.2@100.55,73.9
NetR22_2: R22.2 R23.2 ST4.2 | length 9.6
  Top Layer w0.3: v1(103.75,82.875) 103.75,82.895 103.765,82.91 ST4.2@106.635,82.91
  Bottom Layer w0.3: R22.2@99.415,80 R23.2@101.115,80 102.775,80 103.75,80.975 v1(103.75,82.875)
NetR23_1: R23.1 T2.3 | length 9.4
  Bottom Layer w0.3: R23.1@101.115,78.3 101.115,76.185 101.5,75.8 T2.3@101.5,69.05
RF.CS: IC1.59 R45.2 | length 27.5
  Top Layer w0.2: R45.2@35.155,72.25 35.975,72.25 36.175,72.05 52.95,72.05 53.675,72.775 58.45,72.775 v1(58.75,72.475)
  Bottom Layer w0.2: IC1.59@58.715,69.1 58.715,72.465 58.75,72.5 v1(58.75,72.475)
RF.DATAREADY: IC1.44 R46.2 | length 29.9
  Top Layer w0.2: R46.2@35.165,75.375 36.15,75.375 36.931,74.594 58.894,74.594 59.888,73.6 v1(61.65,73.6)
  Bottom Layer w0.2: v1(61.65,73.6) 61.7,73.65 IC1.44@64.265,73.65
RF.MISO: IC1.60 R44.2 | length 28.6
  Top Layer w0.2: R44.2@35.155,67.75 35.815,67.75 36.45,68.385 36.45,70.325 37.1,70.975 56.7,70.975 v1(57.75,72.025)
  Bottom Layer w0.2: v1(57.75,72.025) 58.215,71.56 IC1.60@58.215,69.1
RF.MOSI: IC1.61 R43.2 | length 26.7
  Top Layer w0.2: R43.2@35.155,69.25 35.75,69.25 36.1,69.6 36.1,70.47 36.98,71.35 54.35,71.35 v1(55.125,72.125)
  Bottom Layer w0.2: v1(55.125,72.125) 56.698,72.125 57.715,71.108 IC1.61@57.715,69.1
RF.ONOFF: IC1.72 R47.2 | length 24.2
  Top Layer w0.2: R47.2@35.155,73.75 v1(36.075,73.75)
  Bottom Layer w0.2: v1(36.075,73.75) 36.075,70.435 40.11,66.4 51.315,66.4 52.215,67.3 IC1.72@52.215,69.1
RF.RESET: IC1.73 R48.2 | length 47.8
  Top Layer w0.2: R48.2@23.915,88.7 v1(25,88.7)
  Bottom Layer w0.2: v1(25,88.7) 33.75,88.7 34.35,88.1 34.35,76.205 34.555,76 34.603,76 36.625,73.978 36.625,70.38 40.115,66.89 51.105,66.89 51.715,67.5 IC1.73@51.715,69.1
RF.SCLK: IC1.62 R42.2 | length 25.1
  Top Layer w0.2: R42.2@35.155,70.75 35.885,70.75 36.835,71.7 53.15,71.7 53.6,72.15 v1(54.1,72.15)
  Bottom Layer w0.2: v1(54.1,72.15) 54.675,71.575 56.753,71.575 57.215,71.113 IC1.62@57.215,69.1
RS232RXD: IC1.51 R15.1 R16.2 | length 27.2
  Bottom Layer w0.2: IC1.51@62.715,69.1 62.715,67.935 63.075,67.575 76.74,67.575 80.765,71.6 82.75,71.6 83.05,71.9 R15.1@83.05,74 R16.2@83.05,75.7
RS232TXD: IC1.52 R14.2 | length 22.8
  Bottom Layer w0.2: IC1.52@62.215,69.1 62.215,67.94 62.93,67.225 77.19,67.225 80.815,70.85 R14.2@82.1,70.85
SMCLK: IC1.32 TP21.1 | length 2.5
  Bottom Layer w0.2: IC1.32@64.265,79.65 65.625,79.65 65.925,79.35 TP21.1@66.615,79.35
TCK: IC1.99 ST2.7 | length 47.5
  Top Layer w0.2: v1(53.061,82.321) 53.061,82.039 53.175,81.925 53.175,82.998 53.527,83.35 66.74,83.35 68.85,85.46 68.85,104.9 69.795,105.845 71.68,105.845 ST2.7@73.215,107.38
  Bottom Layer w0.2: IC1.99@49.165,82.15 50.375,82.15 50.7,82.475 52.625,82.475 53.061,82.039 v1(53.061,82.321)
TDI: IC1.97 ST2.3 | length 43.1
  Top Layer w0.2: v1(51.6,81.375) 51.6,82.413 53.238,84.05 66.45,84.05 68.135,85.735 ST2.3@68.135,107.38
  Bottom Layer w0.2: IC1.97@49.165,81.15 50.5,81.15 50.725,81.375 v1(51.6,81.375)
TDO: IC1.96 ST2.1 | length 44.1
  Top Layer w0.2: v1(50.975,80.7) 50.975,82.325 53.05,84.4 66.305,84.4 67.785,85.88 67.785,105.19 ST2.1@65.595,107.38
  Bottom Layer w0.2: IC1.96@49.165,80.65 50.4,80.65 50.45,80.7 v1(50.975,80.7)
TEST: IC1.95 ST2.8 | length 52.2
  Top Layer w0.2: v1(52.375,81.075) 52.674,81.374 53.401,81.374 53.574,81.546 53.574,82.044 53.725,82.195 53.725,82.875 53.85,83 66.885,83 69.2,85.315 69.2,104.755 69.94,105.495 72.173,105.495 72.175,105.498 73.098,105.498 74.655,107.055 74.655,108.48 ST2.8@73.215,109.92
  Bottom Layer w0.2: IC1.95@49.165,80.15 51.45,80.15 v1(52.375,81.075)
TMS: IC1.98 ST2.5 | length 44.1
  Top Layer w0.2: v1(52.375,81.925) 52.375,82.693 53.383,83.7 66.595,83.7 68.498,85.603 68.498,105.203 ST2.5@70.675,107.38
  Bottom Layer w0.2: IC1.98@49.165,81.65 50.5,81.65 50.775,81.925 v1(52.375,81.925)
USYS: IC2.1 R11.2 R49.1 R50.1 ST3.1 ST3.2 | length 139.7
  Bottom Layer w0.3: R50.1@73.215,99.65 74.015,99.65 74.315,99.35 74.315,93.65 79.215,88.75 79.215,74.25 R11.2@76.365,71.4
  Bottom Layer w0.5: IC2.1@8.55,99.85 8.55,101.735 ; 38.265,100.2 R49.1@40.215,100.2
  Bottom Layer w0.7: 8.55,101.735 8.55,103.035 10.115,104.6 16.975,104.6 ; 38.265,100.2 19.165,100.2 16.975,102.39 ST3.1@16.975,107.38 ST3.2@16.975,109.92 16.975,111.66 17.515,112.2 56.015,112.2 66.365,101.85 70.036,101.85 72.236,99.65 R50.1@73.215,99.65
V+1: IC1.1 ST3.15 | length 34.9
  Bottom Layer w0.2: ST3.15@34.755,107.38 36.211,105.924 40.302,105.924 41.256,104.97 42.806,104.97 44.175,103.6 47.275,103.6 48.271,102.604 48.271,97.63 48.538,97.363 48.538,91.968 49.015,91.491 49.015,87.215 50.715,85.515 IC1.1@50.715,84.2
V+2: IC1.3 ST3.13 | length 39.1
  Top Layer w0.2: ST3.13@32.215,107.38 34.388,105.207 47.13,105.207 49.418,102.918 49.418,97.157 v1(49.75,96.825)
  Bottom Layer w0.2: v1(49.75,96.825) 49.24,96.315 49.24,92.257 49.715,91.781 49.715,87.618 51.715,85.618 IC1.3@51.715,84.2
V+3: IC1.5 ST3.11 | length 42.2
  Top Layer w0.2: ST3.11@29.675,107.38 29.675,105.936 31.135,104.476 46.871,104.476 48.61,102.737 48.61,96.399 v1(50.14,94.869)
  Bottom Layer w0.2: v1(50.14,94.869) 50.14,94.965 50.15,94.975 50.415,94.71 50.415,88.105 52.715,85.805 IC1.5@52.715,84.2
V-1: IC1.2 ST3.16 | length 37.5
  Bottom Layer w0.2: ST3.16@34.755,109.92 36.039,108.636 36.039,106.909 36.674,106.274 40.446,106.274 41.4,105.32 42.951,105.32 44.32,103.95 47.42,103.95 48.621,102.749 48.621,97.93 48.888,97.663 48.888,92.113 49.365,91.636 49.365,87.36 50.038,86.688 51.215,85.51 IC1.2@51.215,84.2
V-2: IC1.4 ST3.14 | length 42
  Top Layer w0.2: ST3.14@32.215,109.92 33.452,108.683 33.452,106.883 34.747,105.588 47.244,105.588 49.768,103.063 49.768,97.75 50.394,97.125 v1(50.394,96.393)
  Bottom Layer w0.2: v1(50.394,96.393) 49.59,95.589 49.59,92.507 50.065,92.031 50.065,87.96 52.215,85.81 IC1.4@52.215,84.2
V-3: IC1.6 ST3.12 | length 44.3
  Top Layer w0.2: ST3.12@29.675,109.92 30.912,108.683 30.912,106.35 32.436,104.826 47.016,104.826 49.021,102.821 49.021,96.646 50.036,95.631 v1(50.419,95.631)
  Bottom Layer w0.2: v1@50.35,95.7 v1(50.419,95.631) 50.765,95.285 50.765,88.25 53.215,85.8 IC1.6@53.215,84.2
VCC: R8.1 | length 1.2
  Bottom Layer w0.2: R8.1@42.565,84.15 v1(43.75,84.15)
VMON: IC1.50 R11.1 R12.2 TP7.1 | length 12.6
  Bottom Layer w0.2: IC1.50@64.265,70.65 66.915,70.65 67.815,69.75 TP7.1@68.515,69.75 68.615,69.65 R12.2@74.665,69.65 ; R12.2@74.605,69.75 74.665,69.69 R11.1@74.665,71.4
pads on no net: D2.2 IC3.1 IC3.4 IC3.7 IC4.1 IC4.4 IC7. ST1.3 ST2.2 ST2.6 ST2.10 ST2.12 ST2.13 ST2.14 ST4.1 ST4.6 ST4.8 ST4.9 ST5.8 ST5.9

## Polygon pours and split planes (outlines as drawn)
DVCC on Mid1 "MID1 Layer-DVCC" (solid, remove dead copper, pour order 104): 87.5,40 87.5,74.95 87.5,75.5 87.5,76 87.5,78.875 82.5,78.875 82.5,110 82.528,112.844 82.5,113 82.5,115 -2.5,115 -2.5,40
AVCC on Mid1 "Mid1 Layer-AVCC" (solid, pour order 99): 25.715,113.28 25.845,113.15 63.215,113.15 63.215,87.15 63.071,87.136 63,87.15 48.215,87.15 48.215,103.65 25.715,103.65 25.715,113.15
DGND on Mid2 "Mid2-DGND" (solid, remove dead copper, pour order 103): 87.5,40 87.5,74.95 87.5,75.5 87.5,76 87.5,78.875 82.5,78.875 82.5,110 82.528,112.844 82.5,113 82.5,115 -2.5,115 -2.5,40
AGND on Mid2 "Mid2 Layer-AGnd" (solid, pour order 100): 25.715,113.28 25.845,113.15 63.215,113.15 63.215,87.15 63.071,87.136 63,87.15 48.215,87.15 48.215,103.65 25.715,103.65 25.715,113.15
DGND on Top Layer "Topt Layer-DGND" (solid, remove dead copper, pour order 101): 87.5,40 87.5,74.95 87.5,75.5 87.5,76 87.5,78.875 82.5,78.875 82.5,110 82.528,112.844 82.5,113 82.5,115 -2.5,115 -2.5,40
AGND on Top Layer "Top Layer-AGND" (solid, pour order 98): 25.75,113.219 25.88,113.089 63.25,113.089 63.25,87.089 63.106,87.075 63.035,87.089 48.25,87.089 48.25,103.589 25.75,103.589 25.75,113.089
DGND on Bottom Layer "Bottm Layer-DGND" (solid, remove dead copper, pour order 102): 87.5,40 87.5,74.95 87.5,75.5 87.5,76 87.5,78.875 82.5,78.875 82.5,110 82.528,112.844 82.5,113 82.5,115 -2.5,115 -2.5,40
AGND on Bottom Layer "Bottom Layer-AGnd" (solid, remove dead copper, pour order 97): 25.75,113.13 25.88,113 63.25,113 63.25,87 63.106,86.986 63.035,87 48.25,87 48.25,103.5 25.75,103.5 25.75,113

## Keep-outs
Keep-Out Layer:
  the board outline again, w0.1

## Other copper
Top Layer:
  text "HSG-IMIT" at 91,46 h4
  text "Esima E-Meter CPU" at 90.5,43.5 h2.5

## Silkscreen, mask and mechanical layers (free items; w line width, h text height)
Mechanical 1:
  the board outline again, w0.1
Mechanical 17:
  drawing of 822 lines, arcs and shapes, not listed

## Text inside footprints (layer, text, board x,y; h text height)
IC7: Top Overlay "1" at 16.275,64.575 h1.33 r90; Top Overlay "1" at 16.2,94.8 h1.33 r90; Top Overlay "P1" at 17.7,66.025 h0.89 r90; Top Overlay "P2" at 17.525,96.35 h0.89 r90
ST1: Bottom Overlay "-" at 9.315,66.25 h0.7 r90; Bottom Overlay "+" at 9.515,91.15 h0.7 r90
ST2: Top Overlay "2" at 62.547,109.412 h1.27; Top Overlay "1" at 62.547,106.872 h1.27; Top Overlay "14" at 82.867,109.412 h1.27; Top Overlay "13" at 82.867,106.872 h1.27
ST3: Top Overlay "2" at 14.435,109.412 h1.27; Top Overlay "1" at 14.435,106.872 h1.27; Top Overlay "25" at 48.979,106.872 h1.27; Top Overlay "26" at 48.979,109.412 h1.27